# Altium PCB pcb.PcbDoc
Units mm, origin at the board's own origin, x right, y up, seen from the top; angles counter-clockwise.
Board outline 200 x 100 mm, 2 copper layers (Top Layer, Bottom Layer); 80 components, 43 nets, 251 pads, 0 vias.
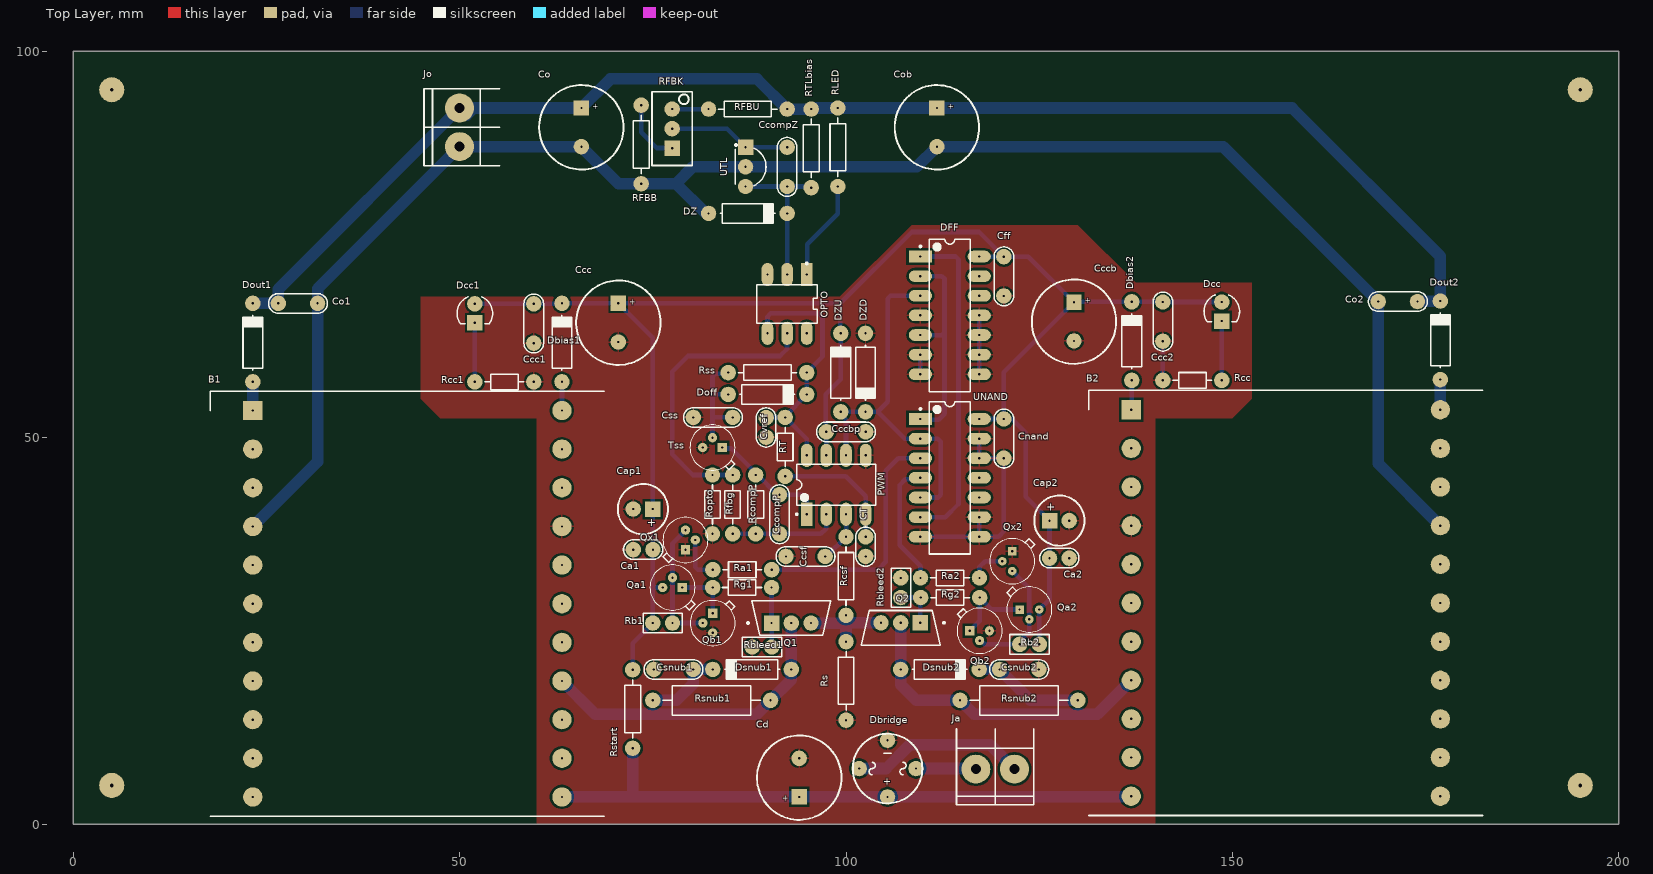
[diagram p0: Top Layer view]
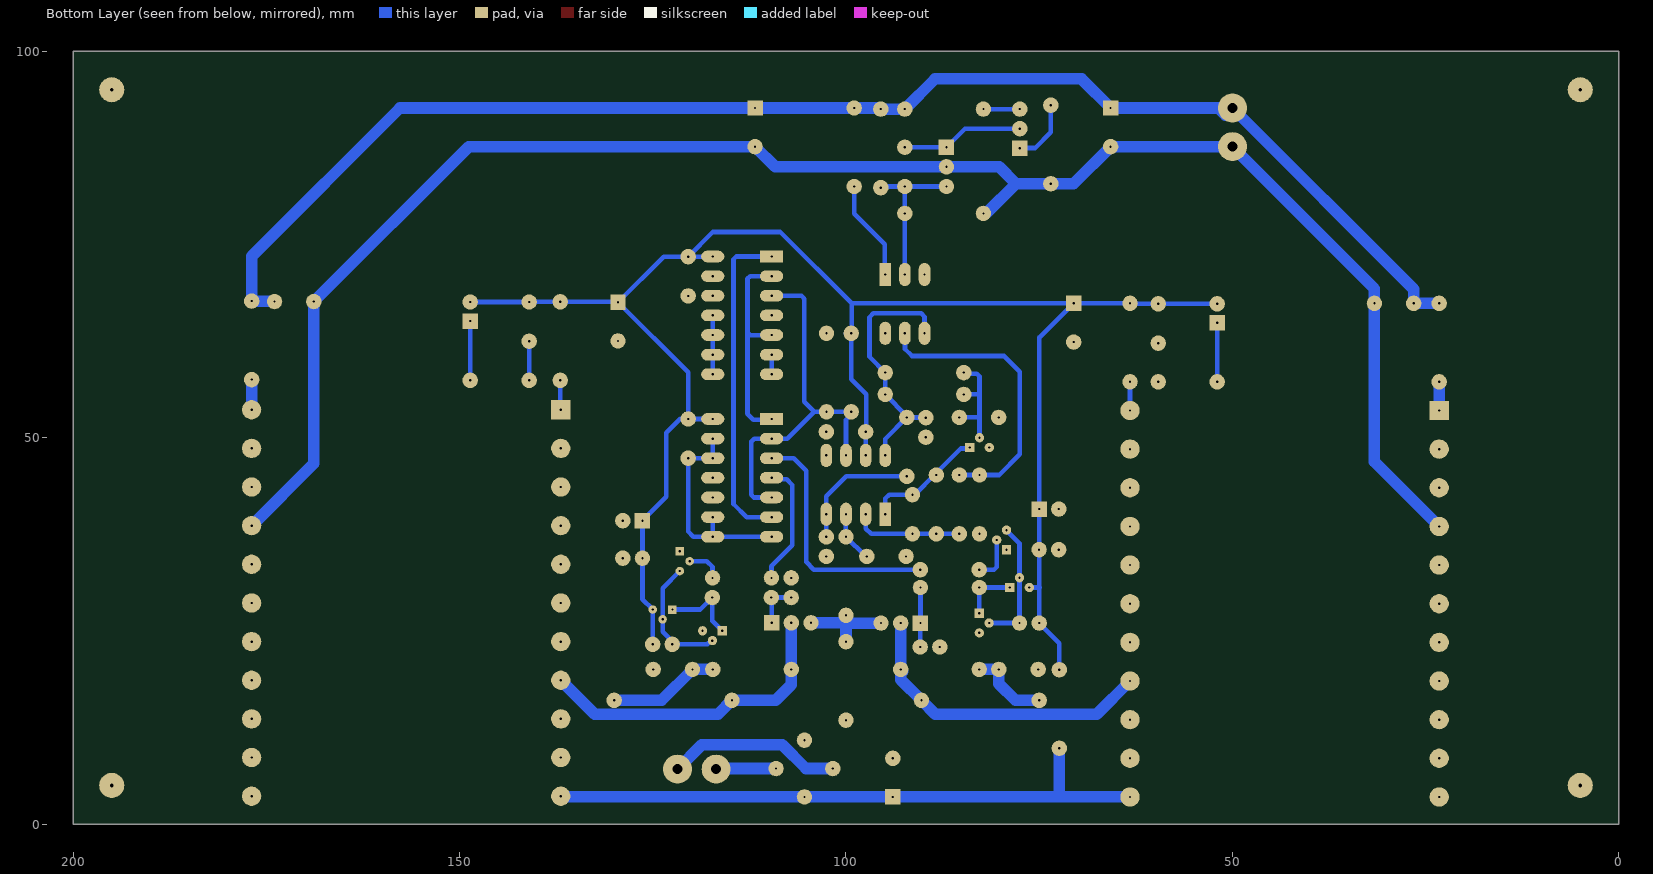
[diagram p1: Bottom Layer view, seen from below]
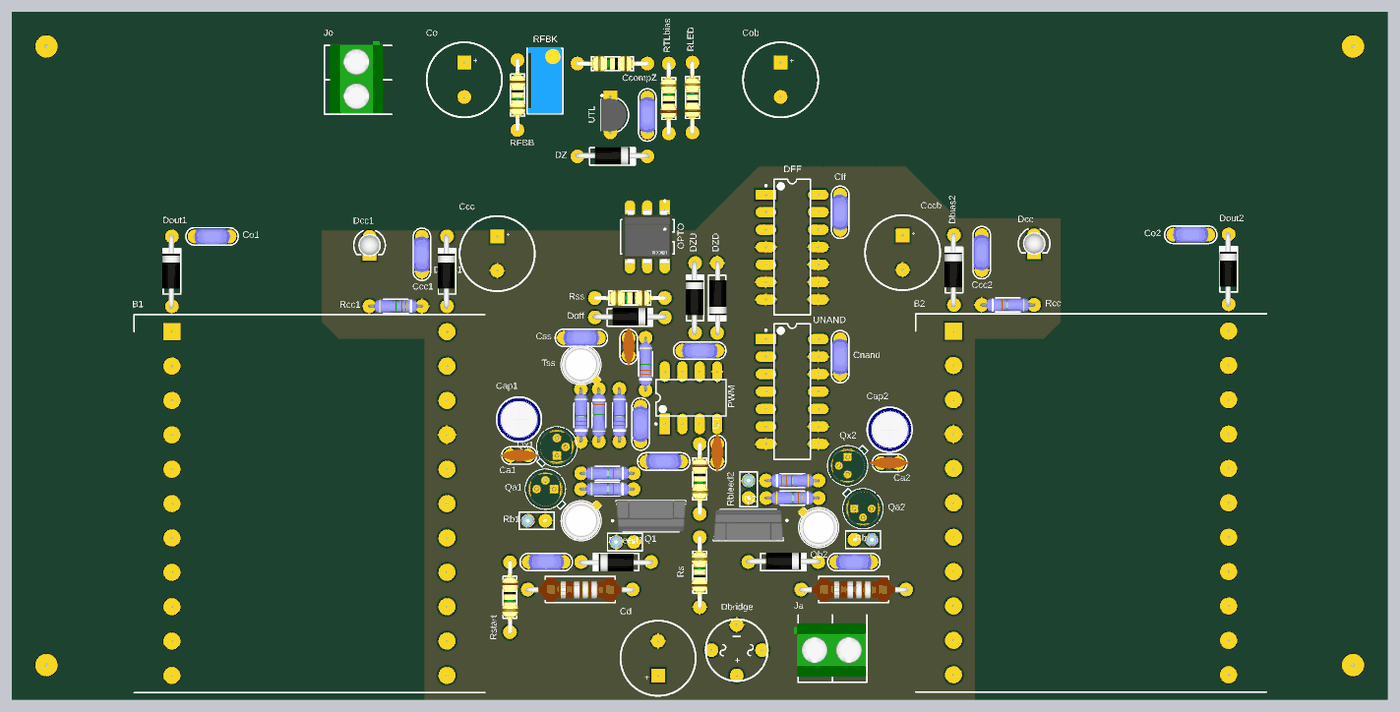
[diagram p2: 3D render of the assembled board from above, using the file's embedded part models]

## Layer stack, top to bottom
Top Solder: solder mask 0.0102, Solder Resist, Dk 3.5
Top Layer: signal copper 0.0356
Dielectric 1: dielectric 0.32, FR-4, Dk 4.8
Bottom Layer: signal copper 0.0356
Bottom Solder: solder mask 0.0102, Solder Resist, Dk 3.5

## Board outline
0,0 200,0 200,100 0,100

## Design rules (kind name [scope] priority, off if disabled: settings)
Clearance [All] p1: gap=0.3 ignorepadtopadclearanceinfootprint=FALSE
PolygonConnect [All] p1: connectstyle=Relief reliefconductorwidth=0.254 reliefentries=4 polygonreliefangle="90 Angle" airgapwidth=0.254
RoutingVias [All] p1: holewidth=0.5 width=2 viastyle="Through Hole" minholewidth=0.3 minwidth=1.5 maxholewidth=0.5 maxwidth=2.5
SolderMaskExpansion [All] p1: expansion=0.102 istentingtop=FALSE
Width [All] p1: maxlimit=2 minlimit=0.6 preferedwidth=0.6
30 further rules are at their usual default settings.

## Components (designator, comment, footprint, x,y, rotation, side; value= is the part's Value field where it differs from the comment)
B1 "E55/28/21-22P" DIPS4000W100P500L5500H4050Q22N 23.25,53.5 r0 top
B2 "E55/28/21-22P" DIPS4000W100P500L5500H4050Q22N 136.9,53.6 r0 top
Ca1 "1u" CAP100 73.75,35.5 r180 top
Ca2 "1u" CAP100 127.606,34.4 r0 top
Cap1 "10u" CAP100RP2 73.73,40.75 r180 top
Cap2 "10u" CAP100RP2 127.606,39.25 r0 top
Ccc "CAPPOL" CAP200RP 70.55,64.86 r270 top
Ccc1 "CAP" CAP200 59.6,64.76 r270 top
Ccc2 "CAP" CAP200 141,65 r270 top
Cccb "CAPPOL" CAP200RP 129.5,65 r270 top
Cccbp "100n" CAP200 100,50.744 r0 top
CcompP "CAP" CAP200 91.402,40.076 r90 top
CcompZ "100p" CAP200 92.38,85.022 r90 top
Ccsf "100p" CAP200 94.767,34.62 r180 top
Cd "100u" CAP200RP 93.946,6 r90 top
Cff "100n" CAP200 120.424,70.866 r270 top
Cnand "100n" CAP200 120.424,49.866 r270 top
Co "CAPPOL" CAP200RP 65.766,90.142 r270 top
Co1 "CAP" CAP200 29.09,67.36 r0 top
Co2 "CAP" CAP200 171.4,67.6 r180 top
Cob "CAPPOL" CAP200RP 111.766,90.142 r270 top
Csnub1 "330p" CAP200 77.681,20 r180 top
Csnub2 "330p" CAP200 122.406,19.998 r0 top
Css "1n" CAP200 82.788,52.606 r180 top
CT "1n" CAP100 102.54,35.89 r270 top
Cvref "1u" CAP100 89.662,51.308 r270 top
Dbias1 "" DO41 63.25,62.28 r90 top
Dbias2 "" DO41 136.972,62.48 r90 top
Dbridge "PUENTE" "PUENTE - W10M" 105.376,3.5 r180 top
Dcc "LED" LED3 148.62,66.321 r270 top
Dcc1 "LED" LED3 51.98,66.081 r270 top
DFF "CD4013BE" N0014A 113.434,65.806 r0 top
Doff "1N4148" DO41 89.84,55.58 r0 top
Dout1 "" DO41 23.25,62.28 r90 top
Dout2 "" DO41 176.9,62.58 r90 top
Dsnub1 "DIODO SCHOTTKY" DO41 87.841,20 r180 top
Dsnub2 "DIODO SCHOTTKY" DO41 112.156,19.998 r0 top
DZ "82V" DO41 87.3,79 r0 top
DZD "Z 16V" DO41 102.524,58.406 r270 top
DZU "Z 16V" DO41 99.324,58.406 r90 top
Ja "BORNERA 2" BORNERA2 119.3,7.1 r90 top
Jo "BORNERA 2" BORNERA2 50,90.142 r0 top
OPTO "4N25" FP-4N25-MFG 92.38,67.296 r270 top
PWM "TL3844P" P0008A 98.73,43.886 r90 top
Q1 "SIHA6N80AE" FP-TO-220FP-7012510-MFG 92.921,26.662 r90 top
Q2 "SIHA6N80AE" FP-TO-220FP-7012510-MFG 107.076,25.371 r270 top
Qa1 "2N2222A" FP-2N2222A-MFG#1 77.551,30.6 r0 top
Qa2 "2N2222A" FP-2N2222A-MFG#2 123.73,27.75 r180 top
Qb1 "2N2907A" FP-TO-18-MFG 82.751,26 r0 top
Qb2 "2N2907A" FP-TO-18-MFG 117.286,25 r90 top
Qx1 "2N2222A" FP-2N2222A-MFG#1 79.23,36.75 r270 top
Qx2 "2N2222A" FP-2N2222A-MFG#2 121.5,34 r90 top
Ra1 "RES" RES300 90.386,32.9 r180 top
Ra2 "RES" RES300 109.646,31.84 r0 top
Rb1 "RES" RES100 76.281,26 r180 top
Rb2 "RES" RES100 123.75,23.25 r0 top
Rbleed1 "10k" RES100 89.13,22.9 r180 top
Rbleed2 "10k" RES100 107.1,30.57 r90 top
Rcc "1k8" RES300 141,57.4 r0 top
Rcc1 "1k8" RES300 59.6,57.2 r180 top
RcompP "RES" RES300 88.316,37.536 r90 top
Rcsf "1k" RES400 100,37.16 r270 top
RFBB "2k" RES400 73.5,93 r270 top
Rfbg "4k7" RES300 85.328,45.156 r270 top
RFBK "10k" "PRESET V" 77.5,89.96 r90 top
RFBU "100k" RES400 92.38,92.5 r180 top
Rg1 "10" RES300 90.371,30.6 r180 top
Rg2 "10" RES300 117.286,29.3 r180 top
RLED "1k2" RES400 98.945,82.482 r90 top
Ropto "180" RES300 82.728,37.536 r90 top
Rs "1" RES400 100.004,13.44 r90 top
Rsnub1 "4k7" RES600 90.24,16 r180 top
Rsnub2 "4k7" RES600 130,16 r180 top
Rss "1k" RES400 94.92,58.406 r180 top
Rstart "100k" RES400 72.4,19.96 r270 top
RT "18k" RES300 92.124,44.986 r90 top
RTLbias "10k" RES400 95.5,82.34 r90 top
Tss "2N2907A" FP-TO-18-MFG 82.728,48.712 r270 top
UNAND "CD4093BE" N0014A 113.434,44.786 r0 top
UTL "TL431CLP" LP0003A 87,85.022 r0 top

## Footprints (in the part's own frame and the unit in brackets; to place one, negate y for a bottom-side part, rotate by r counter-clockwise, add the part's x,y. Pads: shape width x height; smd on the part's side, far side on the other; paste and mask are expansions set on the pad)
BORNERA2 [mm] "Bornera con Tornillos 5mm separación"
  round 3.75 hole 1.3: 1(0,2.5) 2(0,-2.5)
  silkscreen extent -4.6,-5 5.2,5, body extent -3.76,-4.89 3.94,5.61, height 10
CAP100 [mm]
  round 2 hole 0.3: 1(-1.27,0) 2(1.27,0)
  silkscreen extent -2.54,-1.27 2.54,1.27, body extent -2.92,-0.84 2.92,0.86, height 6.12
CAP100RP2 [mm] "Body diameter 6.5mm"
  rect 2x2 hole 0.3: 1(-1.27,0)
  round 2 hole 0.3: 2(1.27,0)
  silkscreen extent -3.25,-3.25 3.25,3.25, body extent -3.15,-3.18 3.2,3.18, height 11.53
CAP200 [mm]
  round 2 hole 0.3: 1(-2.54,0) 2(2.54,0)
  silkscreen extent -3.81,-1.27 3.81,1.27, body extent -2.79,-1.17 2.79,1.12, height 6.24
CAP200RP [mm] "Body Diameter 10.33mm"
  rect 2x2 hole 0.3: 1(-2.5,0)
  round 2 hole 0.3: 2(2.5,0)
  silkscreen extent -5.46,-5.46 5.46,5.46, body extent -5.2,-5.18 5.18,5.21, height 20
DIPS4000W100P500L5500H4050Q22N [mm]
  rect 2.5x2.5 hole 0.3: 1(0,0)
  round 2.5 hole 0.3: 2(0,-5) 3(0,-10) 4(0,-15) 5(0,-20) 6(0,-25) 7(0,-30) 8(0,-35) 9(0,-40) 10(0,-45) 11(0,-50) 12(40,-50) 13(40,-45) 14(40,-40) 15(40,-35) 16(40,-30) 17(40,-25) 18(40,-20) 19(40,-15) 20(40,-10) 21(40,-5) 22(40,0)
  silkscreen extent -5.5,-52.5 45.5,2.5
DO41 [mm]
  round 2 hole 0.3: 1(-5.08,0) 2(5.08,0)
  silkscreen extent -3.56,-1.27 3.56,1.27, body extent -5.46,-1.19 5.46,1.37, height 2.03
FP-2N2222A-MFG#1 [mm]
  rect 1.2x1.2 hole 0.3 paste-1000 mask+0: 1(1.27,0)
  round 1.2 hole 0.3 paste-1000 mask+0: 2(0,1.27) 3(-1.27,0)
  silkscreen extent -2.92,-2.92 2.92,2.92, body extent -3.02,-3.02 3.02,3.02, height 0.25
FP-2N2222A-MFG#2 [mm]
  rect 1.1x1.1 hole 0.3 paste-1000 mask+0: 1(1.27,0)
  round 1.1 hole 0.3 paste-1000 mask+0: 2(0,1.27) 3(-1.27,0)
  silkscreen extent -2.92,-2.92 2.92,2.92, body extent -3.02,-3.02 3.02,3.02, height 0.25
FP-4N25-MFG [mm]
  rect 3x1.5 hole 0.3 paste-1000 mask+0: 1(-3.81,2.54)
  oval 3x1.5 hole 0.3 paste-1000 mask+0: 2(-3.81,0) 3(-3.81,-2.54) 4(3.81,-2.54) 5(3.81,0) 6(3.81,2.54)
  silkscreen extent -5.36,-3.9 2.5,3.9, body extent -4.58,-4 4.58,4, height 0.25
FP-TO-18-MFG [mm]
  rect 1.2x1.2 hole 0.3 paste-1000 mask+0: 1(0,1.27)
  round 1.2 hole 0.3 paste-1000 mask+0: 2(-1.27,0) 3(0,-1.27)
  silkscreen extent -2.92,-2.92 2.92,2.92, body extent -3.02,-3.02 3.02,3.02, height 0.25
FP-TO-220FP-7012510-MFG [mm]
  rect 2x2 hole 0.3 paste-1000 mask+0: 1(-0.663,2.55)
  round 2 hole 0.3 paste-1000 mask+0: 2(-0.663,0) 3(-0.663,-2.55)
  silkscreen extent -2.25,-5.1 2.25,5.72, body extent -2.4,-5.3 2.4,5.3, height 0.25
LED3 [mm]
  round 2 hole 0.3: 1(-1.219,0)
  rect 2x2 hole 0.3: 2(1.245,0)
  silkscreen extent -2.13,-2.3 1.36,2.3, body extent -1.65,-1.63 1.65,1.66, height 0.49
LP0003A [mm] "TO, Flat Index; 3 In-Line, Formed Axial Leads; Body Dia. 4.8mm; Leads 0.56 x 0.41 mm (max)"
  rect 2x2 hole 0.3: 1(0,2.54)
  round 2 hole 0.3: 2(0,0) 3(0,-2.54)
  silkscreen extent -1.35,-2.41 2.65,2.95, body extent -1.33,-2.83 2.35,2.83, height 9.01
N0014A [mm] "DIP, 14-Leads, Body 19.7x6.6mm, Pitch 2.54mm"
  rect 3x1.5 hole 0.3: 1(-3.81,7.62)
  oval 3x1.5 hole 0.3: 2(-3.81,5.08) 3(-3.81,2.54) 4(-3.81,0) 5(-3.81,-2.54) 6(-3.81,-5.08) 7(-3.81,-7.62) 8(3.81,-7.62) 9(3.81,-5.08) 10(3.81,-2.54) 11(3.81,0) 12(3.81,2.54) 13(3.81,5.08) 14(3.81,7.62)
  silkscreen extent -3.93,-9.85 2.65,9.85, body extent -3.95,-9.85 3.95,9.85, height 5.08
P0008A [mm] "DIP, 8-Leads, Body 10.15x6.6mm, Pitch 2.54mm"
  rect 3x1.5 hole 0.3: 1(-3.81,3.81)
  oval 3x1.5 hole 0.3: 2(-3.81,1.27) 3(-3.81,-1.27) 4(-3.81,-3.81) 5(3.81,-3.81) 6(3.81,-1.27) 7(3.81,1.27) 8(3.81,3.81)
  silkscreen extent -3.93,-5.1 2.65,5.23, body extent -3.95,-5.07 3.95,5.07, height 5.08
"PRESET V" [mm]
  rect 2x2 hole 0.3: 1(-2.54,0)
  round 2 hole 0.3: 2(0,0) 3(2.54,0)
  silkscreen extent -4.76,-2.6 4.76,2.6, body extent -4.7,-2.42 4.83,2.42, height 11.55
"PUENTE - W10M" [mm]
  round 2 hole 0.3: 1(0,0) 2(-3.677,-3.677) 3(0,-7.354) 4(3.677,-3.677)
  silkscreen extent -4.5,-8.18 4.5,0.82
RES100 [mm]
  round 2 hole 0.3: 1(-1.27,0) 2(1.27,0)
  silkscreen extent -2.54,-1.27 2.54,1.27, body extent -1.5,-0.91 2.21,0.93, height 1.58
RES300 [mm]
  round 2 hole 0.3: 1(0,0) 2(7.62,0)
  silkscreen extent 1.27,-1.02 6.35,1.02, body extent -0.25,-0.97 7.87,0.97, height 2.01
RES400 [mm]
  round 2 hole 0.3: 1(0,0) 2(10.16,0)
  silkscreen extent 1.27,-1.02 8.89,1.02, body extent -0.3,-1.14 10.46,1.17, height 2.43
RES600 [mm]
  round 2 hole 0.3: 1(0,0) 2(15.24,0)
  silkscreen extent 1.27,-1.9 13.97,1.91, body extent -0.4,-1.72 15.64,1.78, height 3.59

## Part data
B1 B2: library part CPH-E55_28_21-1S-22P-Z, "COIL FORMER HORIZONTAL", Manufacturer_Name=FERROXCUBE, Manufacturer_Part_Number=CPH-E55/28/21-1S-22P-Z, Datasheet Link=https://www.ferroxcube.com/upload/media/product/file/Pr_ds/E55_28_21.pdf, Geometry.Height=40.5mm
Ca1 Ca2 Cccbp CcompZ Ccsf Cff Cnand Csnub1 Csnub2 Css CT Cvref: library part CAP
Cap1 Cap2 Cd: library part CAPPOL
Dbias1 Dbias2 Doff Dout1 Dout2: library part DIODO
DFF: library part CMP-1619-00744-2, "CMOS Dual D-Type Flip Flop, N0014A, TUBE", F @ Nom Voltage(Max)(Mhz)=8, Generic Part Number=CD4013B, ICC @ Nom Voltage(Max)(mA)=0.06, Manufacturer="Texas Instruments", Operating Temperature Range(C)="-55 to 125", Rating=Military, tpd @ Nom Voltage(Max)(ns)=130, Voltage(Nom)(V)=10, 3-State Output=No, Bits(#)=2, Code_JEDEC=MS-001, DatasheetVersion=SCHS023D, Input Type=CMOS, Output Drive (IOL/IOH)(Max)(mA)=1.5/-1.5, Output Logic=Inverted,Non-inverted, Output Type=CMOS, PackageReference=N0014A, Schmitt Trigger=No, Technology Family=CD4000, VCC(Max)(V)=18, VCC(Min)(V)=3
DZ DZD DZU: library part "DIODO ZENER"
OPTO: library part CMP-22018-000009-1, "OPTOISO 2.5KV TRANS W/BASE 6DIP", Case/Package=PDIP, Collector Emitter Breakdown Voltage=30V, Collector Emitter Saturation Voltage=500mV, Current Transfer Ratio=50%, Forward Current=60mA, Forward Voltage=1.5V, Input Current=50mA, Isolation Voltage=5kV, Max Collector Current=100mA, Max Input Current=80mA, Max Operating Temperature=100°C, Max Power Dissipation=250mW, Min Operating Temperature=-55°C, Output Voltage=70V, Package Quantity=2000, Power Dissipation=150mW, Reverse Breakdown Voltage=5V, Collector Emitter Voltage (VCEO)=30V, Collector-emitter Voltage-Max=500mV, Fall Time=2us, Input Type=DC, Isolation Voltage-Max=5kV, Lead Free="Lead Free", Max Output Voltage=30V, Mount="Through Hole", Number of Channels=1, Number of Circuits=1, Number of Elements=1, Number of Pins=6, Output Current per Channel=100mA, Packaging=Rail/Tube, Radiation Hardening=No, Rise Time=2us, Series=-
PWM: library part CMP-0319-00110-2, "PWM Controller with Current Control, 50 % Duty Cycle, 0 to +70 degC, 8-pin PDIP (P), Pb-Free (RoHS)", Frequency(Max)(kHz)=500, Manufacturer="Texas Instruments", Rating=Catalog, Code_JEDEC=MS-001-BA, ComponentLink1Description=Datasheet, ComponentLink1URL=http://www.ti.com/general/docs/lit/getliterature.tsp?genericPartNumber=TL3844&fileType=pdf, Control Method=Current, DatasheetVersion=SLVS038G, Duty Cycle(Max)(%)=50, Eco-Plan="Pb-Free (RoHS)", Mounting Technology="Through Hole", PackageDescription="8-Pin Plastic Dual-In-Line Package, Row Spacing 7.62 mm, Pitch 2.54 mm", PackageReference=P0008A, PackageVersion="revE, Apr-2010", PartNumber=TL3844P, Regulated Outputs(#)=1, SubFamily="PWM Controller", Topology="Boost, Flyback, Forward", UVLO Thresholds On/Off(V)=16/10
Q1 Q2: library part CMP-12198-000018-1, "MOSFET N-CH 800V 12A TO-220FP", Continuous Drain Current=12A, Drain To Source Breakdown Voltage=800V, Drain To Source Resistance=0.37Ω, Gate To Source Voltage=30V, Input Capacitace At Vds="870pF @ 100V", Manufacturer=STMicroelectronics, Manufacturer Part Number=STF13N80K5, Max Forward Diode Voltage=1.5V, Max Junction Temp=+150°C, Package=TO-220FP-7012510, Power Dissipation=35W, Pulse Drain Current=48A, Temperature="-55°C to +150°C", Temperature Range Low=-55°C, Automotive=No, Category=Trans, ComponentLink2Description=Datasheet, ComponentLink2URL=https://www.st.com/resource/en/datasheet/stf13n80k5.pdf, Depletion Mode=False, Device Class L1="Discrete Semiconductors", Device Class L2=Transistors, Device Class L3=MOSFETs, Digikey Description="MOSFET N-CH 800V 12A TO-220FP", Drain To Source Voltage=800V, Gate Charge At Vgs="29nC @ 10V", Height=20mm, Lead Free=Yes, Mouser Description="MOSFET N-Ch 800 V 0.37 Ohm 12 A Zener-protect", Number of Channels=1, Number Of N Channels=1, Octopart=https://octopart.com/stf13n80k5-stmicroelectronics-29487922, Reverse Recovery Charge=5700nC, Reverse Recovery Time=406ns, RoHS=TRUE, Rthja Max=62.5°C/W, Standoff Height=2.9mm, Temperature Range High=+150°C, Threshold Vgs Max=5V, Threshold Vgs Min=3V, Turn Off Delay Time=42ns, Turn On Delay Time=16ns
Qa1 Qa2 Qx1 Qx2: library part CMP-50385-000001-1, "T-NPN SI- AUDIO VHF AMP", Case/Package=TO-18, Collector Emitter Breakdown Voltage=40V, Max Operating Temperature=200°C, Max Power Dissipation=1.2W, Transition Frequency=300MHz, Collector Emitter Voltage (VCEO)=40V, Lead Free="Contains Lead", Number of Pins=3, Polarity=NPN, REACH SVHC="No SVHC"
Qb1 Qb2 Tss: library part CMP-06366-000010-1, "TRANSISTOR PNP 60V 0.8AMP TO-18"
Rbleed1 Rbleed2 Rcc Rcc1 Rcsf RFBB Rfbg RFBU Rg1 Rg2 RLED Ropto Rs Rsnub1 Rsnub2 Rss Rstart RT RTLbias: library part RES
RFBK: library part PRESET
UNAND: library part CMP-1627-00493-3, "CMOS Quad 2-Input NAND Schmitt Triggers, N0014A, TUBE", F @ Nom Voltage(Max)(Mhz)=8, Generic Part Number=CD4093B, ICC @ Nom Voltage(Max)(mA)=0.06, Manufacturer="Texas Instruments", Operating Temperature Range(C)="-55 to 125", Rating=Catalog, Voltage(Nom)(V)=10, Bits(#)=4, Code_JEDEC=MS-001, DatasheetVersion=SCHS115D, Input Type=CMOS, Output Drive (IOL/IOH)(Max)(mA)=1.5/-1.5, Output Type=CMOS, PackageReference=N0014A, Schmitt Trigger=Yes, Technology Family=CD4000, VCC(Max)(V)=18, VCC(Min)(V)=3
UTL: library part CMP-0366-00032-2, "Adjustable Precision Shunt Regulator, 34 ppm / degC, 100 mA, 0 to 70 degC, 3-pin TO-92 (LP), Pb-Free (RoHS)", Manufacturer="Texas Instruments", Rating=Military, Temp Coeff(Max)(ppm/ degree C)=92, Temp Coeff(Typ)(ppm/ degree C)=34, Code_JEDEC=TO-226, ComponentLink1Description="Manufacturer URL", ComponentLink1URL=http://www.ti.com/, ComponentLink2Description=Datasheet, ComponentLink2URL=http://www.ti.com/general/docs/lit/getliterature.tsp?genericPartNumber=TL431&fileType=pdf, ComponentLink3Description="Package Specification", ComponentLink3URL=http://www.ti.com/litv/pdf/msot002a, DatasheetVersion=SLVS543M, Eco-Plan="Pb-Free (RoHS)", Initial Accuracy @ 25/deg C(%)=2, Iout/Iz(Max)(mA)=100, Min Iz for Regulation(uA)=600, Mounting Technology="Through Hole", PackageDescription="Plastic Cylindrical Package, Formed Lead Option (TO-92)", PackageReference=LP0003A, PackageVersion=4040001-2/C, PartNumber=TL431CLP, SubFamily="Shunt Voltage Reference", VO Adj(Max)(V)=36, VO Adj(Min)(V)=2.495

## Free pads (board coordinates)
  round 3.25 hole 0.5: 2(5,5) 2(5,95) 2(195,5) 2(195,95)

## Nets (pads, with @x,y where several pads share a name; then routed paths per layer and width w, separated by ;. In a path a pad name is that pad's centre, name@x,y a point inside that pad or via, vN(x,y) a via of type N, cw(c..) or ccw(c..) an arc to the next point about the centre after c; other vN are vias at no path point)
COMP: CcompP.2 PWM.1 RcompP.2 Tss.1 | length 15.8
  Bottom Layer w0.6: Tss.1 84.126,48.584 85.142,48.584 88.316,45.41 RcompP.2 ; RcompP.2@88.443,45.283 91.11,42.616 CcompP.2 94.414,42.616 94.92,42.11 PWM.1
GNDd: B1.19 B2.4 Ca1.2 Ca2.2 Cap1.2 Cap2.2 Ccc1.2 Ccc2.2 Ccc.2 Cccb.2 Cccbp.2 Ccsf.2 Cd.2 Cff.2 Cnand.2 Csnub1.2 Csnub2.2 Css.2 CT.2 Cvref.2 Dbridge.3 DFF.4 DFF.6 DFF.7 DFF.8 DFF.9 DFF.10 DFF.11 DZD.1 PWM.5 Qb1.3 Qb2.3 Qx1.1 Qx2.1 Rbleed1.2 Rbleed2.2 Rcc1.1 Rcc.1 Ropto.1 Rs.1 Tss.3 UNAND.7 UNAND.8 UNAND.9 UNAND.12 UNAND.13 | length 44
  Bottom Layer w0.6: UNAND.7 UNAND.8 ; DFF.7 DFF.6 ; UNAND.9 UNAND.8 ; UNAND.13 UNAND.12 Cnand.2 120.424,37.849 119.741,37.166 UNAND.8 ; DFF.8 DFF.9 DFF.10 DFF.11 ; Rcc.1 Ccc2.2
GNDo: B1.4 B2.19 Co1.2 Co2.2 Co.2 Cob.2 DZ.1 Jo.2 RFBB.2 UTL.2 | length 229.1
  Bottom Layer w1.5: B1.4 31.63,46.88 Co1.2 31.63,69.272 Jo.2 Co.2 70.568,82.84 RFBB.2 78,82.84 ; DZ.1@81.84,79 78,82.84 ; B2.19 168.86,46.64 Co2.2 148.818,87.642 Cob.2 109.146,85.022 80.182,85.022 78,82.84
Isense: Q1.3 Q2.3 Rcsf.2 Rs.2 | length 12.7
  Bottom Layer w0.6: Rcsf.2@99.997,26.033 Rcsf.2@100.004,26.033 ; Rcsf.2@100,26 100.004,26.004 Rcsf.2@100.004,26.033 ; Rcsf.2@100.004,27.2 Rcsf.2@100.004,26.033
  Bottom Layer w1.5: Q1.3 Rcsf.2@100,26 ; Rs.2 Rcsf.2@100.004,26.004 ; Rcsf.2@100.004,26.033 Q2.3
L: Dbridge.4 Ja.2 | length 22.7
  Bottom Layer w1.5: Dbridge.4 105.177,7.177 108.25,10.25 118.65,10.25 Ja.2
N: Dbridge.2 Ja.1 | length 7.7
  Bottom Layer w1.5: Dbridge.2 Ja.1@116.8,7.177
NetB1_1: B1.1 Dout1.1 | length 3.7
  Bottom Layer w1.5: B1.1 Dout1.1
NetB1_22: B1.22 Dbias1.1 | length 3.7
  Bottom Layer w0.6: B1.22 Dbias1.1
NetB2_1: B2.1 Dbias2.1 | length 3.8
  Bottom Layer w0.6: B2.1 136.972,53.672 Dbias2.1
NetB2_22: B2.22 Dout2.1 | length 3.9
  Bottom Layer w1.5: B2.22 Dout2.1
NetCcompZ_1: CcompZ.1 DZ.2 OPTO.2 RTLbias.1 UTL.3 | length 18.1
  Bottom Layer w0.6: UTL.3 CcompZ.1 94.5,82.482 ; OPTO.2 DZ.2 CcompZ.1@92.38,81.723
NetCcompZ_2: CcompZ.2 RFBK.2 UTL.1 | length 15.9
  Bottom Layer w0.6: RFBK.2 84.602,89.96 UTL.1 CcompZ.2
NetCcsf_1: Ccsf.1 PWM.3 Rcsf.1 | length 6.7
  Bottom Layer w0.6: Ccsf.1 97.46,34.62 100.021,37.181 100.021,40.055 PWM.3
NetCsnub1_1: Csnub1.1 Dsnub1.2 Rsnub1.2 | length 10.5
  Bottom Layer w1.5: Rsnub1.2 78.075,16 80.221,18.146 Csnub1.1 Dsnub1.2
NetCsnub2_1: Csnub2.1 Dsnub2.2 Rsnub2.1 | length 14.4
  Bottom Layer w1.5: Dsnub2.2 Csnub2.1 123.864,16 Rsnub2.1
NetCss_1: Css.1 Doff.1 Rss.2 Tss.2 | length 14.9
  Bottom Layer w0.6: Tss.2 82.728,52.76 ; Doff.1 82.748,55.58 82.728,55.56 ; Rss.2 84.614,58.26 83.079,58.26 82.728,57.909 82.728,55.56 ; Css.1 82.882,52.606 82.728,52.76 ; 82.728,52.76 82.728,55.56
NetDcc1_2: Dcc1.2 Rcc1.2 | length 7.6
  Bottom Layer w0.6: Rcc1.2 Dcc1.2
NetDcc_2: Dcc.2 Rcc.2 | length 7.7
  Bottom Layer w0.6: Rcc.2 Dcc.2
NetDFF_1: DFF.1 UNAND.6 | length 42.4
  Bottom Layer w0.6: UNAND.6 112.858,39.706 114.554,41.402 114.554,73.075 114.203,73.426 DFF.1
NetDFF_2: DFF.2 DFF.5 UNAND.1 | length 27.5
  Bottom Layer w0.6: UNAND.1 109.706,52.324 112.014,52.324 112.75,53.06 112.75,63.601 ; DFF.5 109.64,63.25 112.399,63.25 112.75,63.601 ; DFF.2 112.399,70.886 112.75,70.535 112.75,63.601
NetOPTO_1: OPTO.1 RLED.1 | length 13
  Bottom Layer w0.6: OPTO.1 95,71.186 95,75 98.945,78.945 RLED.1
NetOPTO_5: OPTO.5 Rfbg.1 Ropto.2 | length 37.7
  Bottom Layer w0.6: Rfbg.1 Ropto.2 80.188,45.156 77.524,47.82 77.524,58.522 79.562,60.56 91.462,60.56 92.362,61.46 92.362,63.468 OPTO.5
NetQa1_1: Qa1.1 Qb1.1 Rg1.2 | length 7.3
  Bottom Layer w0.6: Qa1.1 Rg1.2 Qb1.1
NetQa1_2: Qa1.2 Qb1.2 Qx1.3 Rb1.1 | length 16.7
  Bottom Layer w0.6: Qx1.3@79.25,38.02 77.559,36.329 77.559,30.608 77.551,30.6 Rb1.1 Qb1.2
NetQa2_1: Qa2.1 Qb2.1 Rg2.1 | length 10.6
  Bottom Layer w0.6: Qb2.1 117.286,26.27 Rg2.1 118.836,27.75 Qa2.1
NetQa2_2: Qa2.2 Qb2.2 Qx2.3 Rb2.1 | length 16.3
  Bottom Layer w0.6: Qb2.2 117.448,23.73 117.928,23.25 Rb2.1 122.48,23.628 123.73,24.878 Qa2.2 123.73,30.5 Qx2.3
NetQx1_2: Qx1.2 Ra1.2 | length 5.9
  Bottom Layer w0.6: Qx1.2 80.5,33.251 80.851,32.9 Ra1.2
NetQx2_2: Qx2.2 Ra2.2 | length 4.7
  Bottom Layer w0.6: Ra2.2 117.266,33.25 118.016,34 Qx2.2
NetRa1_1: Ra1.1 UNAND.3 | length 33.1
  Bottom Layer w0.6: Ra1.1 104.15,32.9 105.156,33.906 105.156,45.72 106.762,47.326 UNAND.3@110.64,47.326
NetRa2_1: Ra2.1 UNAND.4 | length 16.2
  Bottom Layer w0.6: UNAND.4 109.452,44.614 107.682,44.614 106.934,43.866 106.934,36.068 109.646,33.356 Ra2.1
NetRFBB_1: RFBB.1 RFBK.1 | length 8.3
  Bottom Layer w0.6: RFBB.1 73.5,89.5 75.54,87.46 RFBK.1@77.5,87.46
NetRFBK_3: RFBK.3 RFBU.2 | length 4.9
  Bottom Layer w0.6: RFBK.3 RFBU.2 ; RFBK.3@77.5,92.54 RFBK.3@77.551,92.591 ; RFBU.2@81.789,92.591 RFBU.2@81.84,92.642
OUT: DFF.3 DZD.2 DZU.1 PWM.6 UNAND.2 UNAND.5 | length 51.7
  Bottom Layer w0.6: PWM.6 100,52.271 99.324,52.947 DZU.1 DZD.2 104.126,53.326 ; DFF.3@109.604,68.326 DFF.3 ; UNAND.5 111.917,42.246 112.268,42.597 112.268,49.482 111.884,49.866 UNAND.2 ; DFF.3@110.62,68.326 105.761,68.326 105.41,67.975 105.41,54.61 104.126,53.326 ; UNAND.2@110.64,49.866 107.586,49.866 104.126,53.326
Timing: CT.1 PWM.4 RT.1 | length 16.7
  Bottom Layer w0.6: RT.1 99.944,44.986 102.54,42.39 PWM.4 CT.1
Vcc: Ca1.1 Ca2.1 Cap1.1 Cap2.1 Ccc1.1 Ccc2.1 Ccc.1 Cccb.1 Cccbp.1 Cff.1 Cnand.1 Dbias1.2 Dbias2.2 Dcc1.1 Dcc.1 DFF.14 DZU.2 PWM.7 Qa1.3 Qa2.3 Rb1.2 Rb2.2 Rstart.1 UNAND.14 | length 232.2
  Bottom Layer w0.6: Dcc1.1 Ccc1.1 63.19,67.3 Dbias1.2 Ccc.1 ; Rstart.1 72.4,23.389 Rb1.2 Rb1.2@74.981,26.03 ; 74.951,30.6 74.981,30.57 75.011,30.6 ; 74.951,62.959 Ccc.1 ; Rb1.2@75.011,26.03 75.011,30.57 ; 75.011,62.959 75.011,30.6 ; Qa1.3 75.011,30.6 ; PWM.7 Cccbp.1 97.4,50.804 97.4,55.6 99.324,57.524 DZU.2 99.25,63.56 99.25,67.35 108.5,76.6 117.23,76.6 Cff.1@120.414,73.416 ; 99.25,67.36 Ccc.1 ; DZU.2@100.024,63.466 DZU.2@100.045,63.487 ; UNAND.14 Cnand.1 120.424,58.424 Cccb.1 ; DFF.14 117.254,73.416 Cff.1@120.414,73.416 ; 119.408,73.406 Cff.1 Cff.1@120.414,73.416 ; 121.44,52.406 123.25,50.596 123.25,42.336 Cap2.1 ; 121.44,73.406 123.594,73.406 Cccb.1 ; Rb2.2@125.02,23.75 125.02,27.77 126.336,29.086 Ca2.1 126.336,38.55 Cap2.1@126.189,38.697 ; Ccc2.1@140.8,67.56 Dbias2.2 129.56,67.56 Cccb.1 ; Ccc2.1 Dcc.1
Vd: B1.12 B2.11 Cd.1 Dbridge.1 Rstart.2 | length 80.1
  Bottom Layer w0.6: 72.4,3.6 72.5,3.5 ; Cd.1@93.856,3.5 Cd.1@93.946,3.41 ; Dbridge.1 Dbridge.1@105.426,3.55 ; B2.11@136.85,3.55 B2.11 B2.11@136.895,3.605
  Bottom Layer w1.5: B1.12 72.5,3.5 Cd.1@93.856,3.5 ; 72.4,3.6 Rstart.2 ; Cd.1 Dbridge.1 ; Dbridge.1@105.426,3.55 B2.11@136.85,3.55
Vds1: B1.15 Dsnub1.1 Q1.2 Rsnub1.1 | length 41
  Bottom Layer w1.5: B1.15 67.551,14.199 88.439,14.199 Rsnub1.1 92.921,18.681 Dsnub1.1 ; Dsnub1.1@92.653,19.732 Dsnub1.1 ; Q1.2 Dsnub1.1
Vds2: B2.8 Dsnub2.1 Q2.2 Rsnub2.2 | length 41.3
  Bottom Layer w1.5: Q2.2 Dsnub2.1 107.076,18 109.076,16 Rsnub2.2 116.561,14.199 132.499,14.199 B2.8
Vfb: CcompP.1 PWM.2 RcompP.1 Rfbg.2 | length 14.3
  Bottom Layer w0.6: Rfbg.2 RcompP.1 CcompP.1 96.754,37.536 97.424,38.206 97.424,40.04 PWM.2
VGG1: Q1.1 Rbleed1.1 Rg1.1 | length 7.7
  Bottom Layer w0.6: Rg1.1@90.366,30.6 90.366,26 Q1.1 90.4,25.971 Rbleed1.1
VGG2: Q2.1 Rbleed2.1 Rg2.2 | length 5.8
  Bottom Layer w0.6: Rbleed2.1 Rg2.2 109.626,29.26 Q2.1
Vo: Co1.1 Co2.1 Co.1 Cob.1 Dout1.2 Dout2.2 Jo.1 RFBU.1 RLED.2 RTLbias.2 | length 184.6
  Bottom Layer w1.5: Dout1.2 Co1.1 26.55,69.192 Jo.1 ; Jo.1@50.916,91.726 51.832,92.642 Co.1 69.5,96.376 69.5,96.399 88.481,96.399 RFBU.1 RTLbias.2 ; RTLbias.2@95.5,92.642 RLED.2 Cob.1 157.71,92.642 176.9,73.452 Dout2.2 176.87,67.63 173.97,67.63 Co2.1
Vref: Cvref.1 Doff.2 OPTO.4 PWM.8 Rss.1 RT.2 | length 33.2
  Bottom Layer w0.6: Cvref.1 89.676,52.592 92.11,52.592 RT.2 ; OPTO.4 89.84,65.638 90.262,66.06 96.462,66.06 96.962,65.56 96.962,60.448 Rss.1 Doff.2 92.124,52.784 RT.2 ; PWM.8 94.92,49.81 RT.2
pads on no net: B1.2 B1.3 B1.5 B1.6 B1.7 B1.8 B1.9 B1.10 B1.11 B1.13 B1.14 B1.16 B1.17 B1.18 B1.20 B1.21 B2.2 B2.3 B2.5 B2.6 B2.7 B2.9 B2.10 B2.12 B2.13 B2.14 B2.15 B2.16 B2.17 B2.18 B2.20 B2.21 DFF.12 DFF.13 OPTO.3 OPTO.6 UNAND.10 UNAND.11

## Polygon pours and split planes (outlines as drawn)
GNDd on Top Layer "GNDD_L01_P000" (solid, pour order 0): 45,68.2 99.2,68.2 108.5,77.5 130,77.5 137.5,70 152.5,70 152.5,55 150,52.5 140,52.5 140,0 60,0 60,52.5 52.5,52.5 47.5,52.5 45,55

## Silkscreen, mask and mechanical layers (free items; w line width, h text height)
Mechanical 1:
  the board outline again, w0.1

## Text inside footprints (layer, text, board x,y; h text height)
Cap1: Top Overlay "+" at 75.432,39.455 h1.02 r180
Cap2: Top Overlay "+" at 125.904,40.545 h1.02
Ccc: Top Overlay "+" at 71.795,67.984 h1.27 r270
Cccb: Top Overlay "+" at 130.745,68.124 h1.27 r270
Cd: Top Overlay "+" at 92.701,2.876 h1.27 r90
Co: Top Overlay "+" at 67.011,93.266 h1.27 r270
Cob: Top Overlay "+" at 113.011,93.266 h1.27 r270
Dbridge: Top Overlay "+" at 105.876,6.177 h1.52 r180